# Altium PCB PCB.PcbDoc
Units mm, origin at the board's own origin, x right, y up, seen from the top; angles counter-clockwise.
Board outline 36.4 x 16.2 mm, 2 copper layers (Top Layer, Bottom Layer); 17 components, 10 nets, 41 pads, 28 vias.
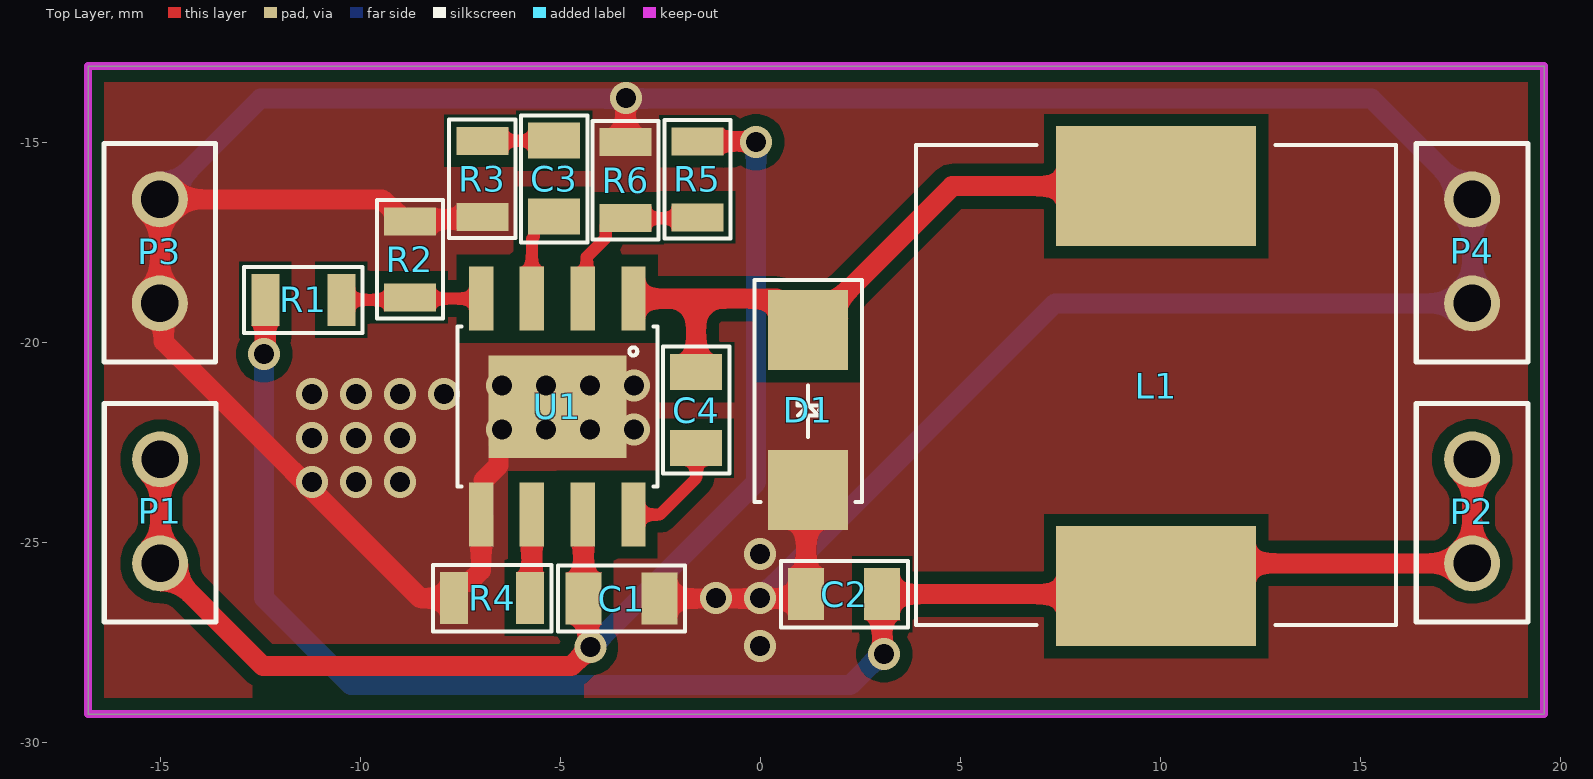
[diagram p0: Top Layer view]
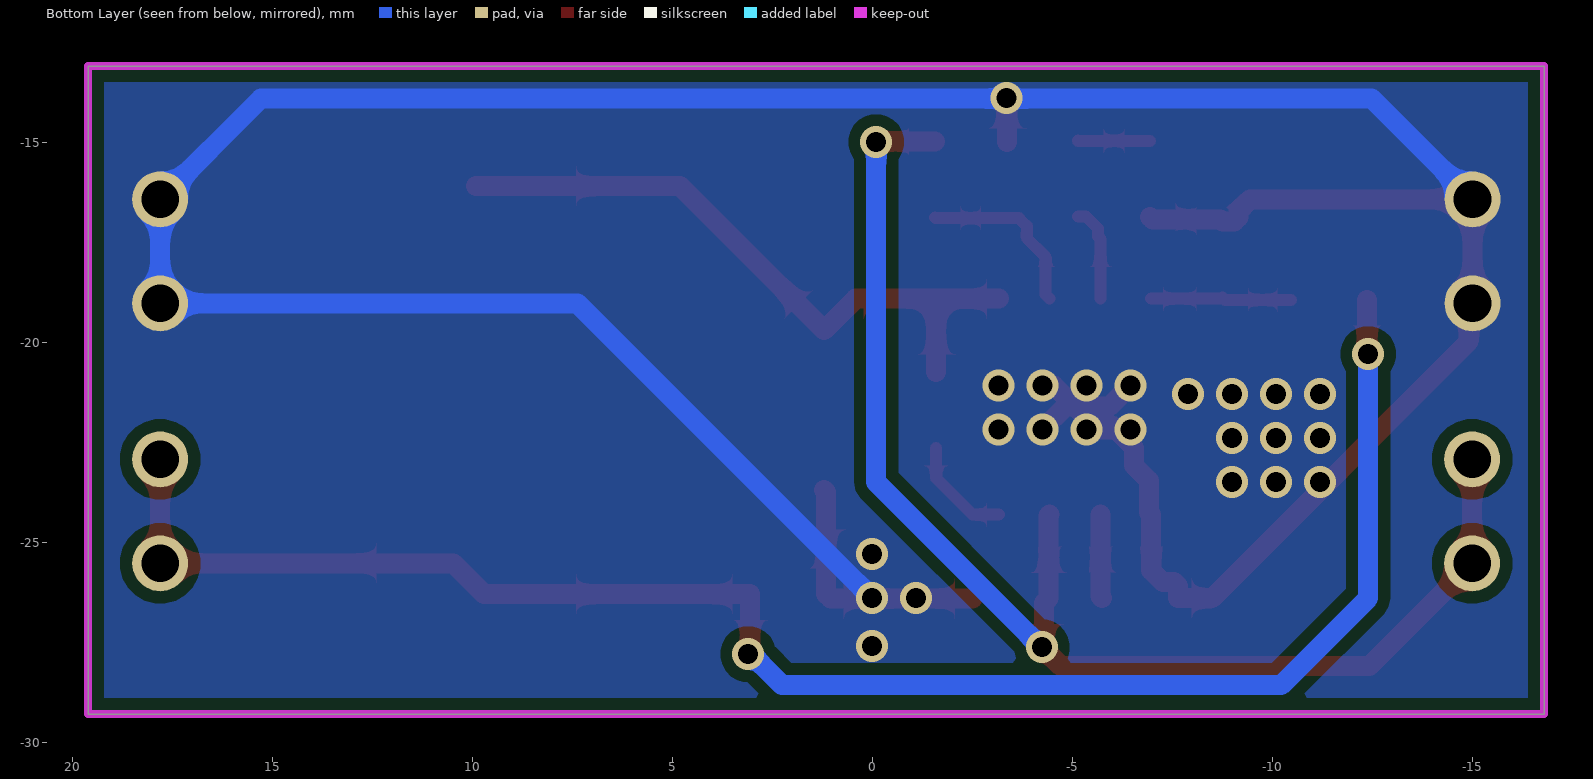
[diagram p1: Bottom Layer view, seen from below]
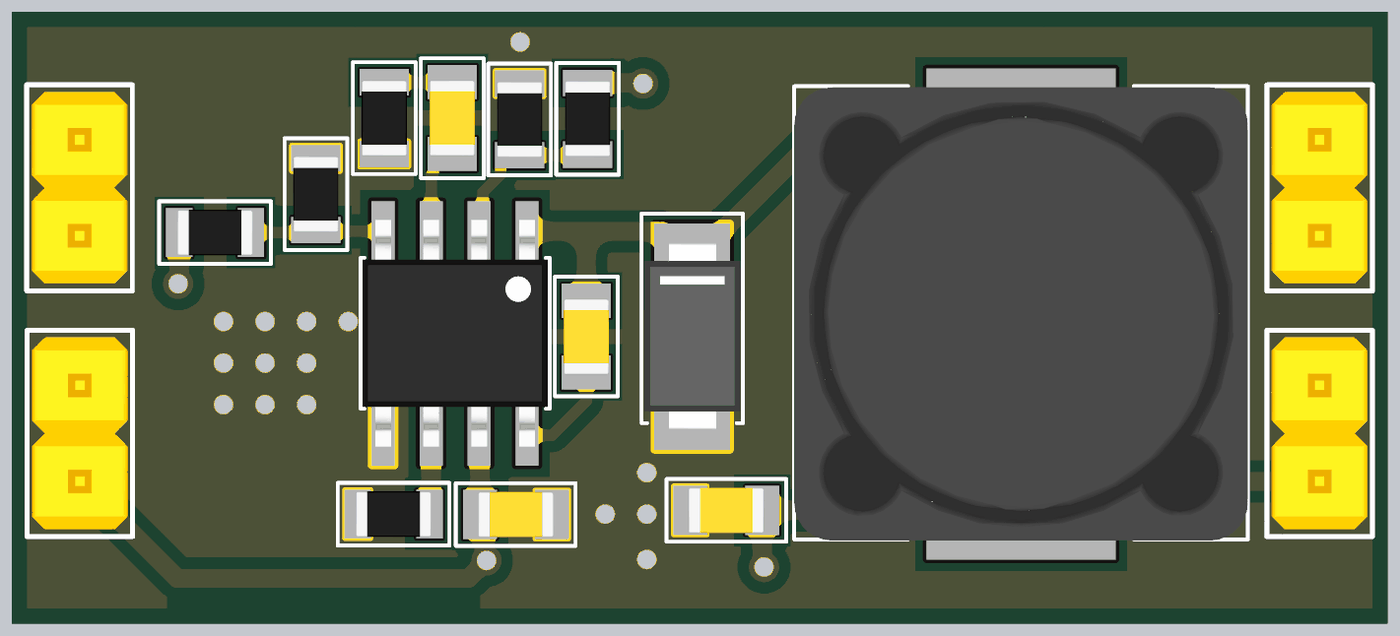
[diagram p2: 3D render of the assembled board from above, using the file's embedded part models]

## Layer stack, top to bottom
Top Solder: solder mask 0.0102, Solder Resist, Dk 3.5
Top Layer: signal copper 0.0356
Dielectric 1: dielectric 0.32, FR-4, Dk 4.8
Bottom Layer: signal copper 0.0356
Bottom Solder: solder mask 0.0102, Solder Resist, Dk 3.5

## Board outline
-16.8,-29.3 -16.8,-13.1 19.6,-13.1 19.6,-29.3

## Design rules (kind name [scope] priority, off if disabled: settings)
Clearance [All] p1: gap=0.3 ignorepadtopadclearanceinfootprint=FALSE
HoleToHoleClearance [All] p1: gap=0.3 allowstackedmicrovias=TRUE
MinimumSolderMaskSliver [All] p1: minsoldermaskwidth=0.3
PolygonConnect PolygonConnect_2 [All vs IsNamedPolygon('GND_L02_P001')] p1: connectstyle=Direct reliefconductorwidth=0.254 reliefentries=4 polygonreliefangle="90 Angle" airgapwidth=0.254
PolygonConnect PolygonConnect_1 [All vs IsNamedPolygon('GND_L01_P000')] p2: connectstyle=Direct reliefconductorwidth=0.254 reliefentries=4 polygonreliefangle="90 Angle" airgapwidth=0.254
PolygonConnect [All] p3: connectstyle=Relief reliefconductorwidth=0.254 reliefentries=4 polygonreliefangle="90 Angle" airgapwidth=0.254
RoutingVias [All] p1: holewidth=0.5 width=0.8 viastyle="Through Hole" minholewidth=0.5 minwidth=0.8 maxholewidth=0.5 maxwidth=0.8
SilkToSilkClearance [All] p1: silktosilkclearance=0.1
SilkToSolderMaskClearance [IsPad] p1: minsilkscreentomaskgap=0.1 clearancetoexposedcopper=TRUE
SolderMaskExpansion [All] p1: expansion=0.1 istentingtop=FALSE
UnRoutedNet [All] p1: checkbadconnections=TRUE
Width "Width power" [InNet('+*') or InNet('GND') or InNet('SW')] p1: maxlimit=1 minlimit=0.5 preferedwidth=0.5
Width [All] p2: maxlimit=0.5 minlimit=0.3 preferedwidth=0.3
25 further rules are at their usual default settings.

## Components (designator, comment, footprint, x,y, rotation, side; value= is the part's Value field where it differs from the comment)
C1 "10uF 50v" C805 -3.463,-26.409 r180 top
C2 "22uF 6.3v" C805 2.1,-26.3 r0 top
C3 "220pF" C805 -5.148,-15.913 r270 top
C4 "100nF" C805 -1.6,-21.7 r90 top
D1 "SS34" SS14(SMA) 1.2,-21.7 r90 top
L1 "10uH" "Inductor 12x12" 9.9,-21.1 r270 top
P1 "Pin Header 2x1,2.54mm" PCBComponent_1 -15,-24.2 r90 top
P2 "Pin Header 2x1,2.54mm" PCBComponent_1 17.8,-24.2 r90 top
P3 "Pin Header 2x1,2.54mm" PCBComponent_1 -15.009,-17.7 r90 top
P4 "Pin Header 2x1,2.54mm" PCBComponent_1 17.8,-17.7 r90 top
R1 "124k" R805 -11.422,-18.945 r0 top
R2 "40.2k" R805 -8.755,-17.929 r90 top
R3 "68.1k" R805 -6.946,-15.916 r270 top
R4 "200k" R805 -6.7,-26.4 r180 top
R5 "100k" R805 -1.567,-15.932 r270 top
R6 "24.9k" R805 -3.366,-15.951 r90 top
U1 "MP1584EN-LF" MP1584 -5.072,-21.612 r270 top

## Footprints (in the part's own frame and the unit in brackets; to place one, negate y for a bottom-side part, rotate by r counter-clockwise, add the part's x,y. Pads: shape width x height; smd on the part's side, far side on the other; paste and mask are expansions set on the pad)
C805 [mm]
  rect 0.9x1.3 smd mask+0.06: 1(-0.95,0) 2(0.95,0)
  silkscreen extent -1.58,-0.83 1.59,0.83, body extent -1,-0.6 1,0.6, height 0.71
"Inductor 12x12" [mm]
  rect 3x5 smd: 1(-5,0) 2(5,0)
  silkscreen extent -6.03,-6 5.97,6, body extent -6,-6 6,6, height 8
MP1584 [mm]
  rect 1.6x0.61 smd: 1(-2.7,1.905) 2(-2.7,0.635) 3(-2.7,-0.635) 4(-2.7,-1.905) 5(2.7,-1.905) 6(2.7,-0.635) 7(2.7,0.635) 8(2.7,1.905)
  rect 2.56x3.45 smd: 5(0,0)
  silkscreen extent -2,-2.5 2,2.5, body extent -3,-2.45 3,2.45, height 1.75
PCBComponent_1 [mm]
  round 1.4 hole 0.94 mask+0.1: 1(-1.33,0) 2(1.27,0)
  silkscreen extent -2.79,-1.4 2.67,1.4, body extent -2.6,-1.27 2.48,1.27, height 9.5
R805 [mm]
  rect 0.7x1.3 smd mask+0.06: 1(-0.95,0) 2(0.95,0)
  silkscreen extent -1.48,-0.83 1.48,0.83, body extent -1,-0.6 1,0.6, height 0.51
SS14(SMA) [mm]
  rect 2x2 smd: A(-2,0) K(2,0)
  silkscreen extent -2.29,-1.34 3.26,1.34, body extent -2.46,-1.28 2.47,1.26, height 2.01

## Part data
C1 C2 C3 C4: library part C0805
D1: library part SS14(DO-214AA)
L1: library part "Inductor 12x12"
R1 R2 R3 R4 R5 R6: library part R0805
U1: "Switching Voltage Regulators 3A 1.5MHz 28V Nonsync Buck", Case/Package=SOIC, Manufacturer="Monolithic Power Systems", Max Input Voltage=28V, Max Operating Temperature=85°C, Max Output Voltage=25V, Min Input Voltage=4.5V, Min Operating Temperature=-20°C, Min Output Voltage=800mV, Output Current=3A, Output Voltage=3.3V, Package Quantity=100, Supplier Part Number 1=1589-1861-ND, Switching Frequency=1.5MHz, Category="Voltage Regulators - Switching", ComponentLink1Description=http://www.mouser.com/ds/2/277/MP1584_r1.0-779241.pdf?src-supplier=Mouser, ComponentLink1URL=http://www.mouser.com/ds/2/277/MP1584_r1.0-779241.pdf?src-supplier=Mouser, ComponentLink2Description=http://www.monolithicpower.com/Portals/0/Documents/Products/Documents/datasheet/MP1584_r1.0.pdf?src-supplier=Digi-Key, ComponentLink2URL=http://www.monolithicpower.com/Portals/0/Documents/Products/Documents/datasheet/MP1584_r1.0.pdf?src-supplier=Digi-Key, ComponentLink3Description=https://www.monolithicpower.com/pub/media/document/MP1584_r1.0.pdf?src-supplier=Digi-Key, ComponentLink3URL=https://www.monolithicpower.com/pub/media/document/MP1584_r1.0.pdf?src-supplier=Digi-Key, Lead Free="Lead Free", Manufacturer Part Number=MP1584EN-LF, Mount="Surface Mount", Number of Outputs=1, Operating Supply Voltage=28V, Output Configuration=Positive, Output Type=Adjustable, Packaging="Tape and Reel", Pricing="100=2.17040 (USD)", RoHS=Yes, Supplier 1=Digi-Key, Synchronous Rectifier=No

## Via types
v1: diameter 0.8, hole 0.5, Top Layer to Bottom Layer, tented both sides, 28 vias

## Nets (pads, with @x,y where several pads share a name; then routed paths per layer and width w, separated by ;. In a path a pad name is that pad's centre, name@x,y a point inside that pad or via, vN(x,y) a via of type N, cw(c..) or ccw(c..) an arc to the next point about the centre after c; other vN are vias at no path point)
+3V3: C2.2 L1.2 P2.1 P2.2 R1.1 | length 43.4
  Top Layer w0.5: v1(-12.4,-20.3) -12.372,-20.272 R1.1 ; v1(3.1,-27.8) 3.05,-27.75 C2.2 9.7,-26.3 L1.2 10.47,-25.53 P2.1 P2.2
  Bottom Layer w0.5: v1(-12.4,-20.3) -12.4,-26.4 -10.224,-28.576 2.25,-28.576 3.026,-27.8 v1(3.1,-27.8)
+12v: C1.2 P1.1 P1.2 R5.1 U1.7 | length 33.8
  Top Layer w0.5: P1.2 P1.1 -12.43,-28.1 -4.716,-28.1 v1(-4.242,-27.626) -4.299,-27.569 -4.299,-26.523 C1.2 -4.413,-24.336 U1.7 ; R5.1 -0.118,-14.982 v1(-0.1,-15)
  Bottom Layer w0.5: v1(-4.242,-27.626) -4.226,-27.626 -0.1,-23.5 v1(-0.1,-15)
BST: C4.1 U1.8 | length 2.7
  Top Layer w0.3: U1.8 -2.512,-24.312 -1.6,-23.4 C4.1
COMP: C3.2 U1.3 | length 2.4
  Top Layer w0.3: U1.3 -5.707,-17.422 -5.648,-17.363 -5.648,-17.163 -5.348,-16.863 C3.2
EN: R5.2 R6.1 U1.2 | length 4.4
  Top Layer w0.3: U1.2 -4.336,-18.811 -4.336,-17.871 -3.866,-17.401 -3.866,-17.101 -3.666,-16.901 R6.1 -1.586,-16.901 R5.2
FB: R1.2 R2.1 U1.4 | length 3.5
  Top Layer w0.3: R1.2 -8.821,-18.945 R2.1 -8.722,-18.912 U1.4
FREQ: R4.1 U1.6 | length 2.1
  Top Layer w0.5: R4.1 -5.707,-26.357 U1.6
GND: C1.1 C2.1 D1.A P3.1 P3.2 P4.1 P4.2 R2.2 R3.2 R4.2 R6.2 U1.5 | length 99.4
  Top Layer w0.5: R3.2 -7.012,-16.931 -8.707,-16.931 R2.2 -9.055,-16.979 -9.155,-16.879 -9.155,-16.723 -9.448,-16.43 P3.2 P3.1 -14.914,-19.125 -14.914,-19.986 -8.5,-26.4 R4.2 -7.65,-26.1 -7.55,-26 -7.27,-26 -6.977,-25.707 -6.977,-24.312 -6.922,-24.257 -6.922,-23.462 -6.547,-23.087 -6.547,-22.642 -5.99,-22.085 U1.5@-5.74,-22.085 ; v1(-6.454,-22.183) -5.643,-22.183 U1.5@-5.213,-21.753 ; v1(-6.454,-21.083) -5.925,-21.612 U1.5@-5.072,-21.612 ; v1(-5.354,-22.183) -5.354,-21.894 U1.5@-5.072,-21.612 ; v1(-5.354,-21.083) -5.213,-21.224 U1.5@-5.213,-21.471 ; v1(-4.254,-22.183) -4.825,-21.612 U1.5@-5.072,-21.612 ; v1(-4.254,-21.083) -4.543,-21.083 U1.5@-5.072,-21.612 ; R6.2 -3.366,-13.913 v1(-3.353,-13.9) ; C1.1 1.041,-26.409 C2.1 1.15,-23.75 D1.A
  Bottom Layer w0.5: P3.2 -12.489,-13.91 -3.363,-13.91 v1(-3.353,-13.9) -3.343,-13.91 15.28,-13.91 P4.2 P4.1 7.37,-19.03 v1(0,-26.4)
  other v1: 0,-27.6 0,-27.6 -1.1,-26.4 0,-25.3 -11.2,-23.5 -10.1,-23.5 -9,-23.5 -11.2,-22.4 -10.1,-22.4 -9,-22.4 -3.154,-22.183 -11.2,-21.3 -10.1,-21.3 -9,-21.3 -7.9,-21.3 -3.154,-21.083
NetC3_1: C3.1 R3.1 | length 1.8
  Top Layer w0.3: R3.1 -5.15,-14.966 C3.1
SW: C4.2 D1.K L1.1 U1.1 | length 16.7
  Top Layer w0.5: U1.1 -1.6,-18.912 ; C4.2 -1.6,-18.912 ; L1.1 4.8,-16.1 D1.K 0.412,-18.912 -1.6,-18.912

## Polygon pours and split planes (outlines as drawn)
GND on Top Layer "GND_L01_P000" (solid, remove dead copper, pour order 0): -16.8,-13.1 19.6,-13.1 19.6,-29.3 -16.8,-29.3
GND on Bottom Layer "GND_L02_P001" (solid, remove dead copper, pour order 1): -16.8,-13.1 19.6,-13.1 19.6,-29.3 -16.8,-29.3

## Keep-outs
Keep-Out Layer:
  the board outline again, w0.2

## Other copper
Top Layer:
  pour cut-out: -12.7,-28.3 -4.4,-28.3 -4.4,-29.3 -12.7,-29.3